# Altium PCB dalibors-dock.PcbDoc
Units mm, origin at the board's own origin, x right, y up, seen from the top; angles counter-clockwise.
Board outline 60 x 75 mm, 2 copper layers (Top Layer, Bottom Layer), stack 1.471 mm thick; 10 components, 18 nets, 39 pads, 1 vias.
Unrouted connection lines stored in the file: 1.
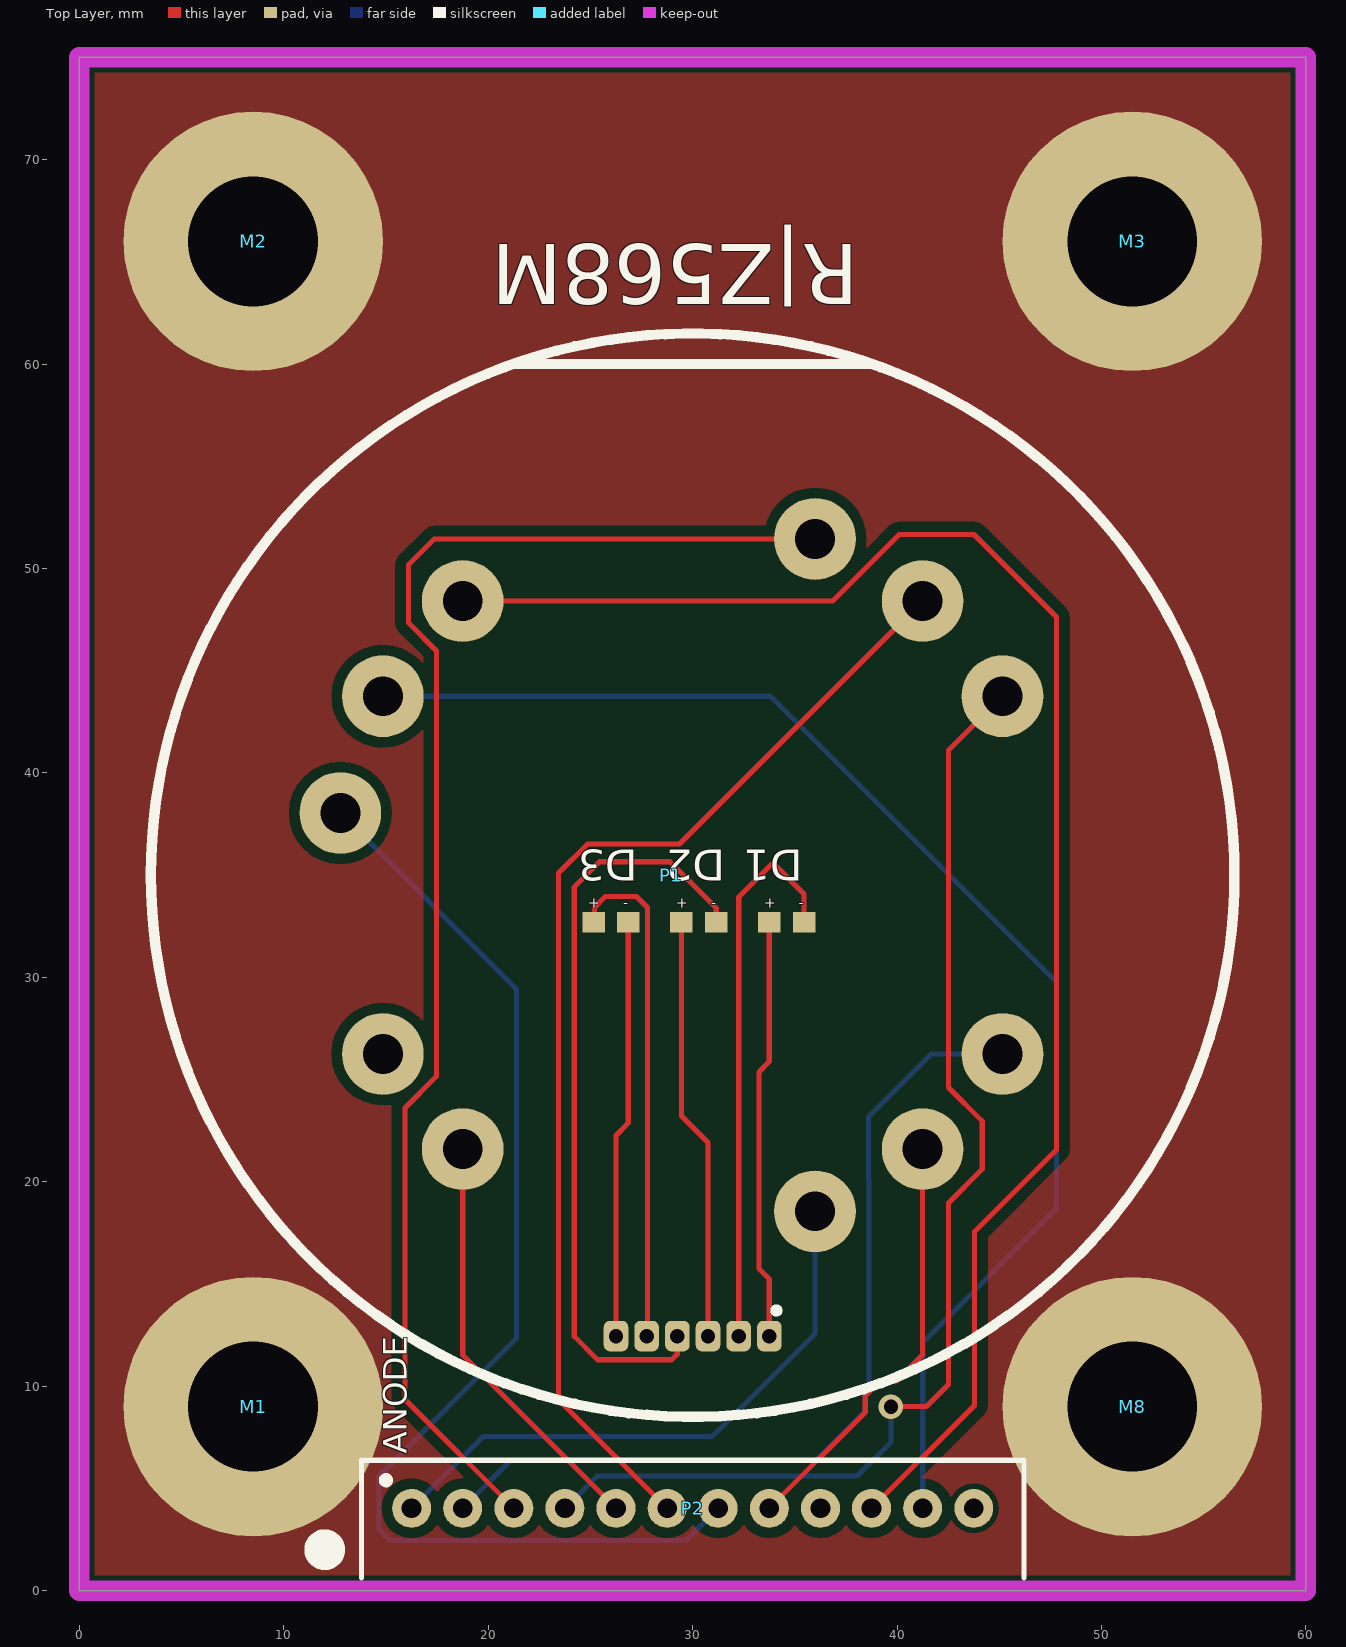
[diagram p0: Top Layer view]
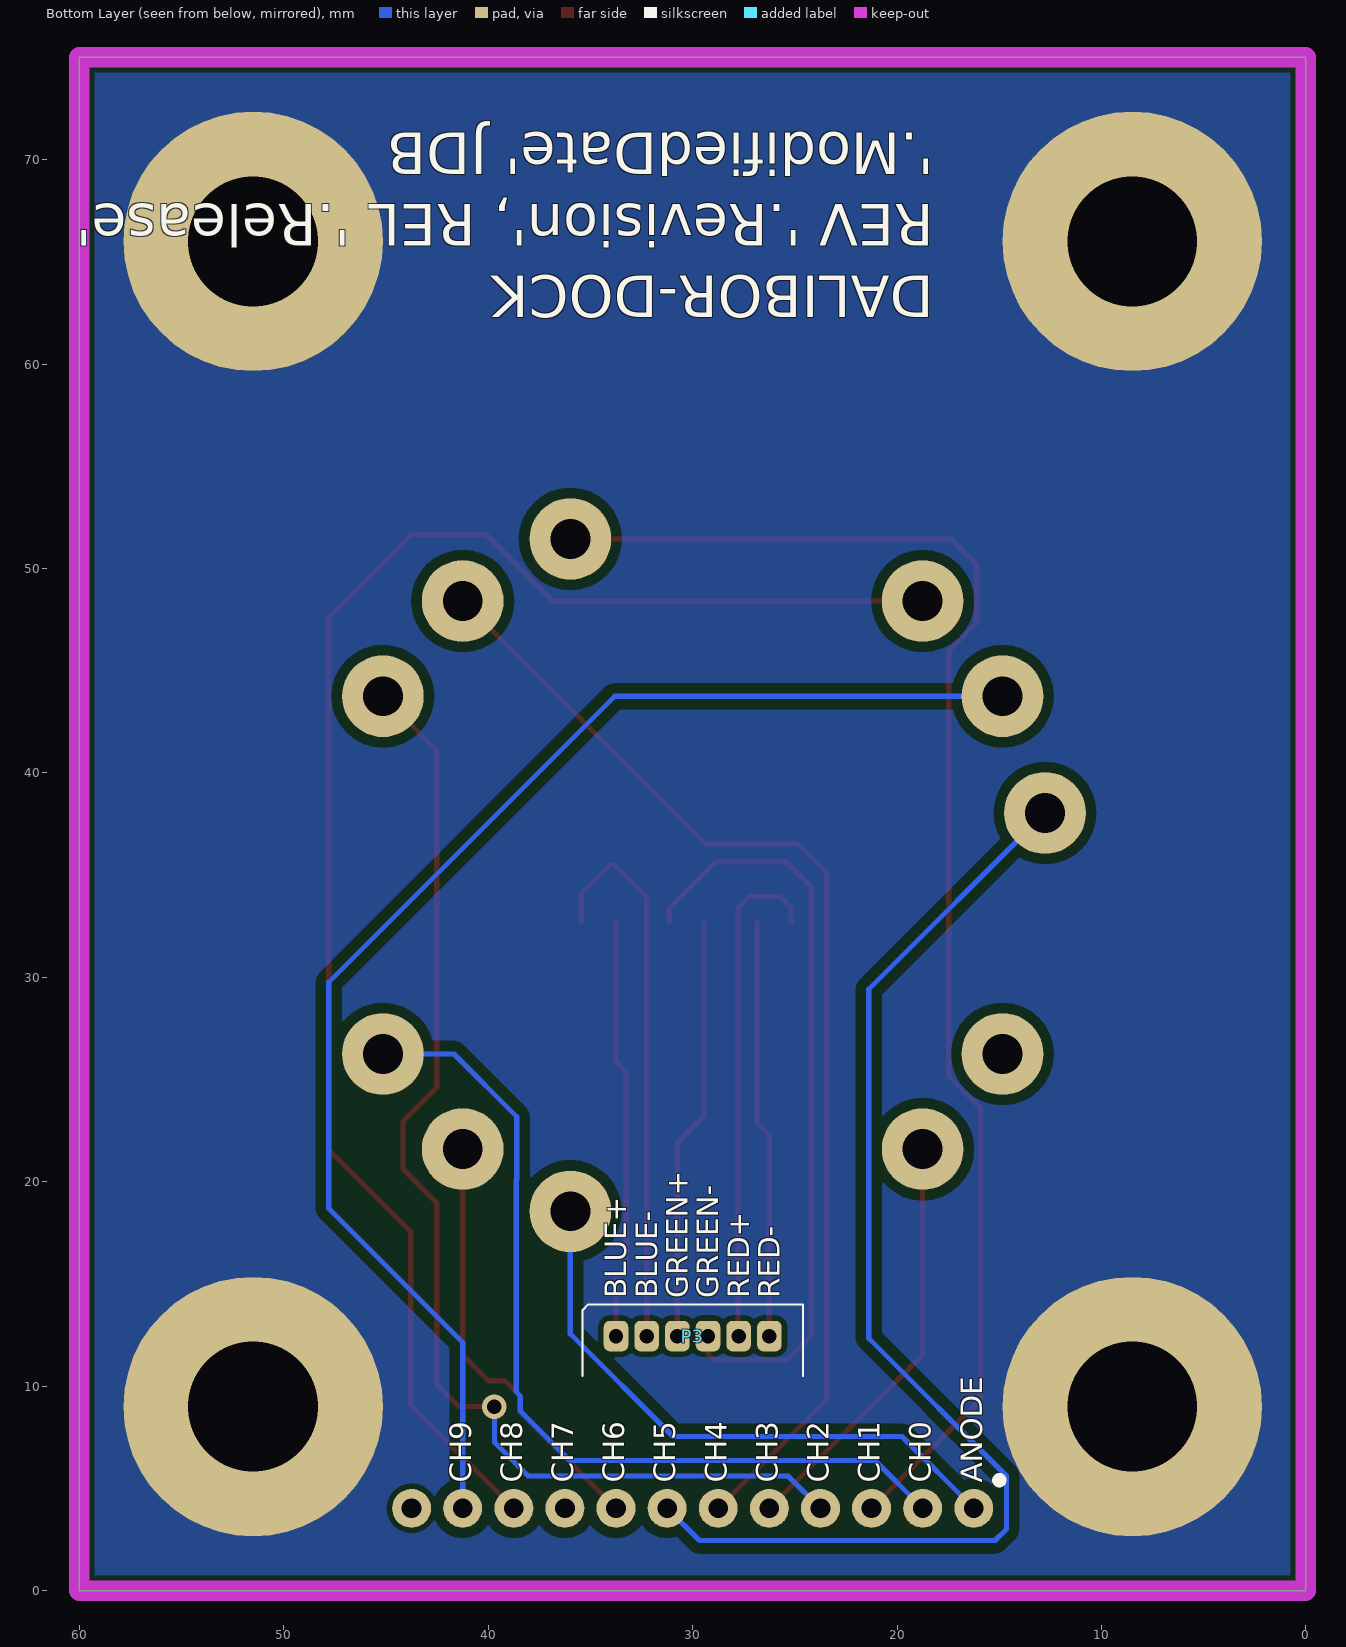
[diagram p1: Bottom Layer view, seen from below]
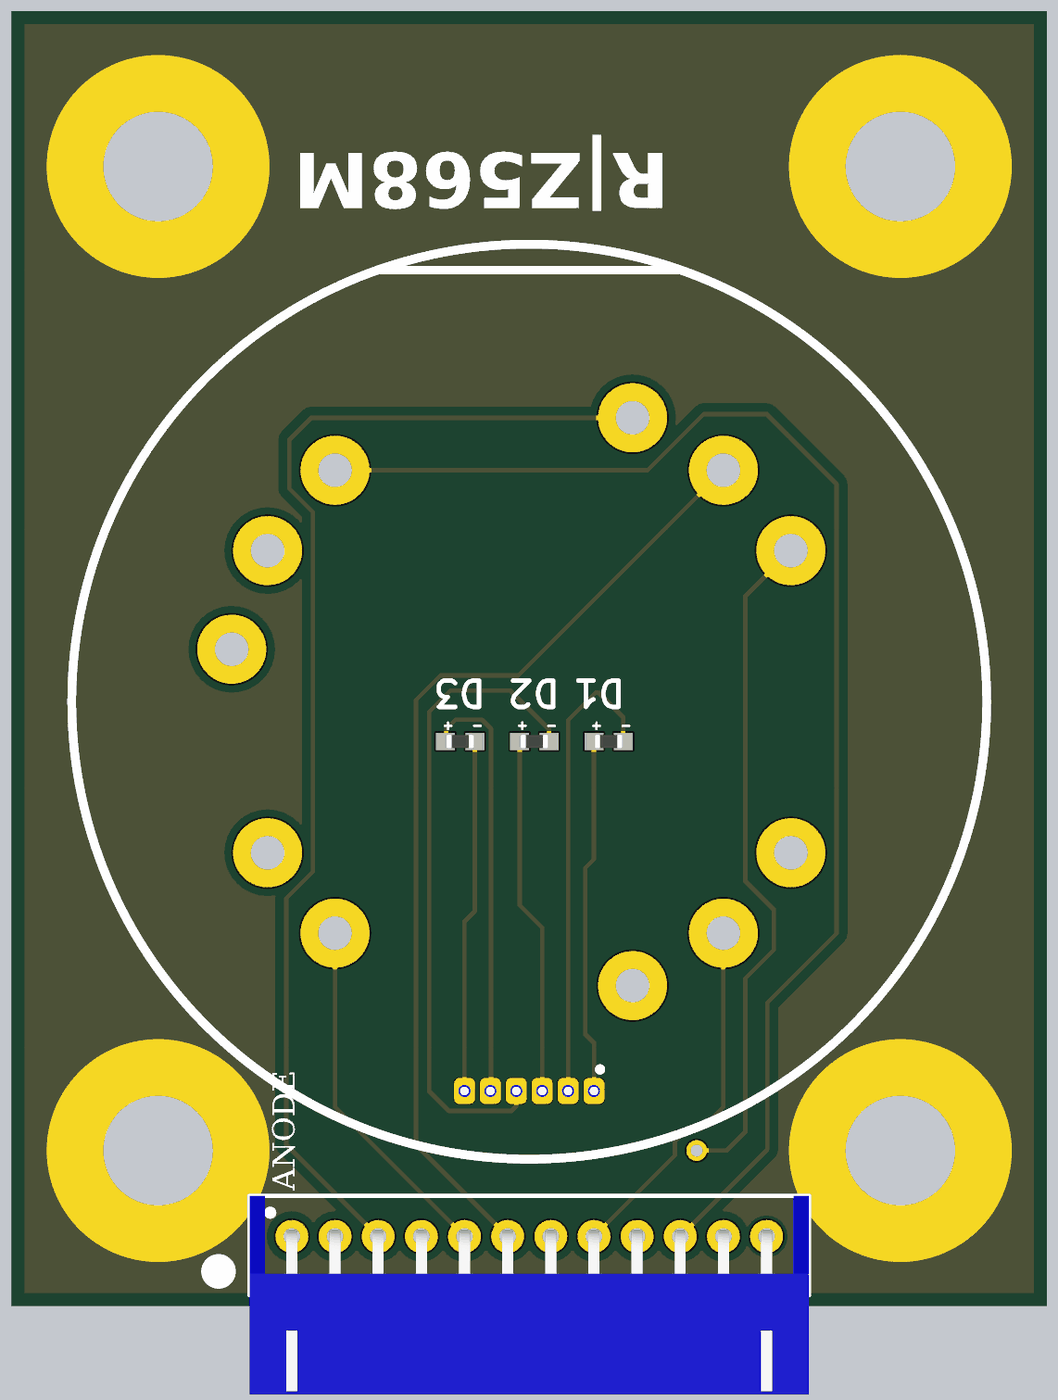
[diagram p2: 3D render of the assembled board from above, using the file's embedded part models]

## Layer stack, top to bottom
Top Solder: solder mask 0.0102, Solder Resist, Dk 3.5
Top Layer: signal copper 0.0356
Dielectric 1: dielectric 1.4, FR-4, Dk 4.8
Bottom Layer: signal copper 0.0356
Bottom Solder: solder mask 0.0102, Solder Resist, Dk 3.5

## Board outline
0,0 60,0 60,75 0,75

## Design rules (kind name [scope] priority, off if disabled: settings)
Clearance Clearance_hv [InNetClass('HV')] p1: gap=0.5 ignorepadtopadclearanceinfootprint=FALSE
Clearance [All] p2: gap=0.254 ignorepadtopadclearanceinfootprint=FALSE except(0: Arc-Hole Track-Hole SMDPad-Hole THPad-Hole Via-Hole Fill-Hole Poly-Hole Region-Hole Text-Hole)
ComponentClearance [All] p1 off: gap=0.254 collisioncheckmode=3 verticalgap=0.254 showdistances=FALSE
HoleSize [All] p1: absolutevalues=TRUE maxlimit=6.35 minlimit=0.6 maxpercent=80.000 minpercent=20.000
MinimumSolderMaskSliver [All] p1 off: minsoldermaskwidth=0.254
PolygonConnect PolygonConnect_Vias [IsVia or InComponent('M*')] p1: connectstyle=Direct reliefconductorwidth=0.254 reliefentries=4 polygonreliefangle="90 Angle" airgapwidth=0.254
PolygonConnect [All] p2: connectstyle=Relief reliefconductorwidth=0.254 reliefentries=4 polygonreliefangle="90 Angle" airgapwidth=0.254
RoutingVias [All] p1: holewidth=0.6 width=1 viastyle="Through Hole" minholewidth=0.6 minwidth=1 maxholewidth=0.6 maxwidth=10
SilkToSilkClearance [All] p1 off: silktosilkclearance=0.254
SilkToSolderMaskClearance [IsPad] p1 off: minsilkscreentomaskgap=0.254 clearancetoexposedcopper=TRUE
SolderMaskExpansion [All] p1: expansion=0.102 istentingtop=FALSE
Width [All] p1: maxlimit=2.54 minlimit=0.254 preferedwidth=0.254
25 further rules are at their usual default settings.

## Classes and differential pairs
net class HV: ANODE N1_0 N1_1 N1_2 N1_3 N1_4 N1_5 N1_6 N1_7 N1_8 N1_9

## Components (designator, comment, footprint, x,y, rotation, side; value= is the part's Value field where it differs from the comment)
D1 "LNJ926W8CRA" 0603_LED 34.6,32.7 r0 top
D2 "LNJ326W83RA" 0603_LED 30.3,32.7 r0 top
D3 "LNJ237W82RA" 0603_LED 26,32.7 r0 top
M1 "MOUNT" MOUNT1-4_20 8.5,9 r180 top
M2 "MOUNT" MOUNT1-4_20 8.5,66 r180 top
M3 "MOUNT" MOUNT1-4_20 51.5,66 r180 top
M8 "MOUNT" MOUNT1-4_20 51.5,9 r180 top
P1 "RZ568M" RZ568M 30,35 r180 top locked
P2 "S12B-XH-A" S12B-XH-A 30,3.5 r0 top
P3 "S6B-ZR" S6B-ZR 30,12 r0 bottom

## Footprints (in the part's own frame and the unit in brackets; to place one, negate y for a bottom-side part, rotate by r counter-clockwise, add the part's x,y. Pads: shape width x height; smd on the part's side, far side on the other; paste and mask are expansions set on the pad)
0603_LED [mm] "SMD; Body 1.6 x 0.9 mm (LxW typ)"
  rect 1.1x1 smd: 1(-0.85,0) 2(0.85,0)
  body extent -0.8,-0.4 0.8,0.4, height 0.9
MOUNT1-4_20 [mm] "1/4-20 mount"
  round 12.7 hole 6.35: 1(0,0)
RZ568M [mm] "Nixie Tube Socket"
  round 4 hole 1.95: 0(-15.155,8.75) 1(-5.985,-16.445) 2(-15.155,-8.75) 3(11.249,13.406) 4(-11.249,-13.406) 5(17.234,-3.039) 6(-11.249,13.406) 7(15.155,8.75) 8(11.249,-13.406) 9(15.155,-8.75) A(-5.985,16.445)
  silkscreen extent -26.5,-26.5 26.5,26.5
S6B-ZR [mm] "1.5mm pitch right angle 6-position"
  rrect50% 1.2x1.5 hole 0.7 paste-1.5 mask+0.05: 1(3.75,-0.45) 2(2.25,-0.45) 3(0.75,-0.45) 4(-0.75,-0.45) 5(-2.25,-0.45) 6(-3.75,-0.45)
  silkscreen extent -5.4,-2 5.4,1.5, body extent -5.25,-1.85 5.25,4.15, height 3.7
S12B-XH-A [mm] "2.5mm pitch right angle 12-position"
  round 1.905 hole 0.965: 1(-13.75,0.525) 2(-11.25,0.525) 3(-8.75,0.525) 4(-6.25,0.525) 5(-3.75,0.525) 6(-1.25,0.525) 7(1.25,0.525) 8(3.75,0.525) 9(6.25,0.525) 10(8.75,0.525) 11(11.25,0.525) 12(13.75,0.525)
  silkscreen extent -16.2,-2.88 16.2,2.87, body extent -16.2,-8.63 16.2,2.87, height 6.15

## Part data
D1: library part LED0603GR, "LED, SMT 0603, Color Blue, 5mA, 2.9V", Manufacturer=Panasonic, Package="0603 Polarized", Alternate="any same color LED", Manufacturer P/N=LNJ926W8CRA, Note=Blue, Tr=-30:85
D2: library part LED0603GR, "LED, SMT 0603, Color Green, 10mA, 2.05V", Manufacturer=Panasonic, Package="0603 Polarized", Alternate="any same color LED", Manufacturer P/N=LNJ326W83RA, Note=Green, Tr=-30:85
D3: library part LED0603Y, "LED, SMT 0603, Color Red, 10mA, 2.05V", Manufacturer=Panasonic, Package="0603 Polarized", Alternate="any same color LED", Manufacturer P/N=LNJ237W82RA, Note=Red, Tr=-30:85
P1: "Nixie Tube Socket", Manufacturer="Glow Tube Research", Manufacturer P/N=RZ568M
P2: "2.5mm pitch right angle 12-position", Manufacturer=JST, Manufacturer P/N=S12B-XH-A
P3: "1.5mm pitch right angle 6-position", Manufacturer=JST, Manufacturer P/N=S6B-ZR

## Via types
v1: diameter 1.2, hole 0.7, Top Layer to Bottom Layer, 1 vias

## Nets (pads, with @x,y where several pads share a name; then routed paths per layer and width w, separated by ;. In a path a pad name is that pad's centre, name@x,y a point inside that pad or via, vN(x,y) a via of type N, cw(c..) or ccw(c..) an arc to the next point about the centre after c; other vN are vias at no path point)
ANODE: P1.A P2.1 | length 29.3
  Bottom Layer w0.254: P2.1 19.759,7.534 30.957,7.534 35.985,12.562 P1.A
BLUE_ANODE: D1.1 P3.1 | length 20.7
  Top Layer w0.254: P3.1 33.75,15.238 33.246,15.742 33.246,25.373 33.75,25.876 D1.1
BLUE_CATHODE: D1.2 P3.2 | length 27.3
  Top Layer w0.254: P3.2 32.25,33.928 33.845,35.523 34.008,35.523 35.45,34.081 D1.2
GND: M1.1 M2.1 M3.1 M8.1
GREEN_ANODE: D2.1 P3.3 | length 20.8
  Top Layer w0.254: D2.1 29.45,23.214 30.75,21.914 P3.3
GREEN_CATHODE: D2.2 P3.4 | length 37.6
  Top Layer w0.254: P3.4 29.25,11.576 28.971,11.297 25.347,11.297 24.204,12.44 24.204,34.411 25.448,35.655 28.889,35.655 31.15,33.395 D2.2
N1_0: P1.0 P2.2 | length 44
  Bottom Layer w0.254: P2.2 21.084,6.359 36.017,6.359 38.438,8.78 38.438,9.523 38.631,9.716 38.631,20.06 38.605,20.085 38.605,23.184 41.672,26.25 P1.0
N1_1: P1.1 P2.3 | length 70
  Top Layer w0.254: P2.3 15.923,9.352 15.923,23.613 17.473,25.162 17.473,45.969 16.101,47.341 16.101,50.184 17.362,51.445 P1.1
N1_2: P1.2 P2.4 | length 58.4
  Top Layer w0.254: v1(39.7,9) 41.44,9 42.517,10.077 42.517,18.967 44.168,20.618 44.168,22.955 42.517,24.606 42.517,41.112 P1.2
  Bottom Layer w0.254: P2.4 25.33,5.605 38.044,5.605 39.7,7.26 v1(39.7,9)
N1_3: P1.3 P2.5 | length 20.7
  Top Layer w0.254: P1.3 18.751,11.524 P2.5
N1_4: P1.4 P2.6 | length 56.6
  Top Layer w0.254: P2.6 23.442,9.333 23.442,35.096 24.864,36.519 29.362,36.519 P1.4
N1_5: P1.5 P2.7 | length 58.9
  Bottom Layer w0.254: P1.5 21.384,29.421 21.384,12.345 14.653,5.614 14.653,3.004 15.212,2.445 29.67,2.445 P2.7
N1_6: P1.6 P2.8 | length 21.1
  Top Layer w0.254: P2.8 38.438,8.713 38.438,9.523 39.177,10.262 39.987,10.262 41.249,11.524 P1.6
N1_7: P1.7 P2.9
N1_8: P1.8 P2.10 | length 79.4
  Top Layer w0.254: P1.8 36.853,48.406 40.104,51.657 43.762,51.657 47.8,47.619 47.8,21.566 43.787,17.553 43.787,9.062 P2.10
N1_9: P1.9 P2.11 | length 67.2
  Bottom Layer w0.254: P1.9 33.813,43.75 47.8,29.762 47.8,18.688 41.25,12.138 P2.11
RED_ANODE: D3.1 P3.5 | length 24.8
  Top Layer w0.254: D3.1 25.194,32.7 25.194,33.42 25.728,33.953 27.252,33.953 27.785,33.42 27.785,12.627 27.75,12.592 P3.5
RED_CATHODE: D3.2 P3.6 | length 20.5
  Top Layer w0.254: P3.6 26.25,22.269 26.85,22.869 D3.2
pads on no net: P2.12

## Polygon pours and split planes (outlines as drawn)
GND on Bottom Layer "GND_B" (solid, remove dead copper, pour order 0): 0,0 60,0 60,75 1,75 0,75
GND on Top Layer "GND_T" (solid, remove dead copper, pour order 2): 0,0 60,0 60,75 1,75 0,75

## Keep-outs
Keep-Out Layer:
  the board outline again, w1

## Silkscreen, mask and mechanical layers (free items; w line width, h text height)
Top Overlay:
  circle w1: c12,2 r0.5
  text "J. BRINTON / REV. 2" at 22,94 h5
  text "R|Z568M" at 38.115,66.801 h5 r180
  text "ANODE" at 16.4,6.7 h2 r90
Bottom Overlay:
  text "DALIBOR-DOCK / REV '.Revision', REL '.Release' / '.ModifiedDate' JDB" at 18.219,72 h3.5 r180
  text "RED-" at 25.4,14.3 h1.8 r270
  text "RED+" at 26.9,14.3 h1.8 r270
  text "GREEN-" at 28.4,14.3 h1.8 r270
  text "GREEN+" at 29.9,14.3 h1.8 r270
  text "BLUE-" at 31.4,14.3 h1.8 r270
  text "BLUE+" at 32.9,14.3 h1.8 r270
  text "ANODE" at 15.5,5.275 h1.8 r270
  text "CH0" at 18,5.275 h1.8 r270
  text "CH1" at 20.5,5.275 h1.8 r270
  text "CH2" at 23,5.275 h1.8 r270
  text "CH3" at 25.5,5.275 h1.8 r270
  text "CH4" at 28,5.275 h1.8 r270
  text "CH5" at 30.5,5.275 h1.8 r270
  text "CH6" at 33,5.275 h1.8 r270
  text "CH7" at 35.5,5.275 h1.8 r270
  text "CH8" at 38,5.275 h1.8 r270
  text "CH9" at 40.5,5.275 h1.8 r270
Mechanical 1:
  the board outline again, w1
Mechanical 2:
  the board outline again, w1

## Text inside footprints (layer, text, board x,y; h text height)
D1: Top Overlay "-" at 35.2,33.4 h0.51; Top Overlay "+" at 33.5,33.4 h0.51
D2: Top Overlay "-" at 30.9,33.4 h0.51; Top Overlay "+" at 29.2,33.4 h0.51
D3: Top Overlay "-" at 26.6,33.4 h0.51; Top Overlay "+" at 24.9,33.4 h0.51